# EAGLE board usbSimStepper-v10-routed (EAGLE 5.04)
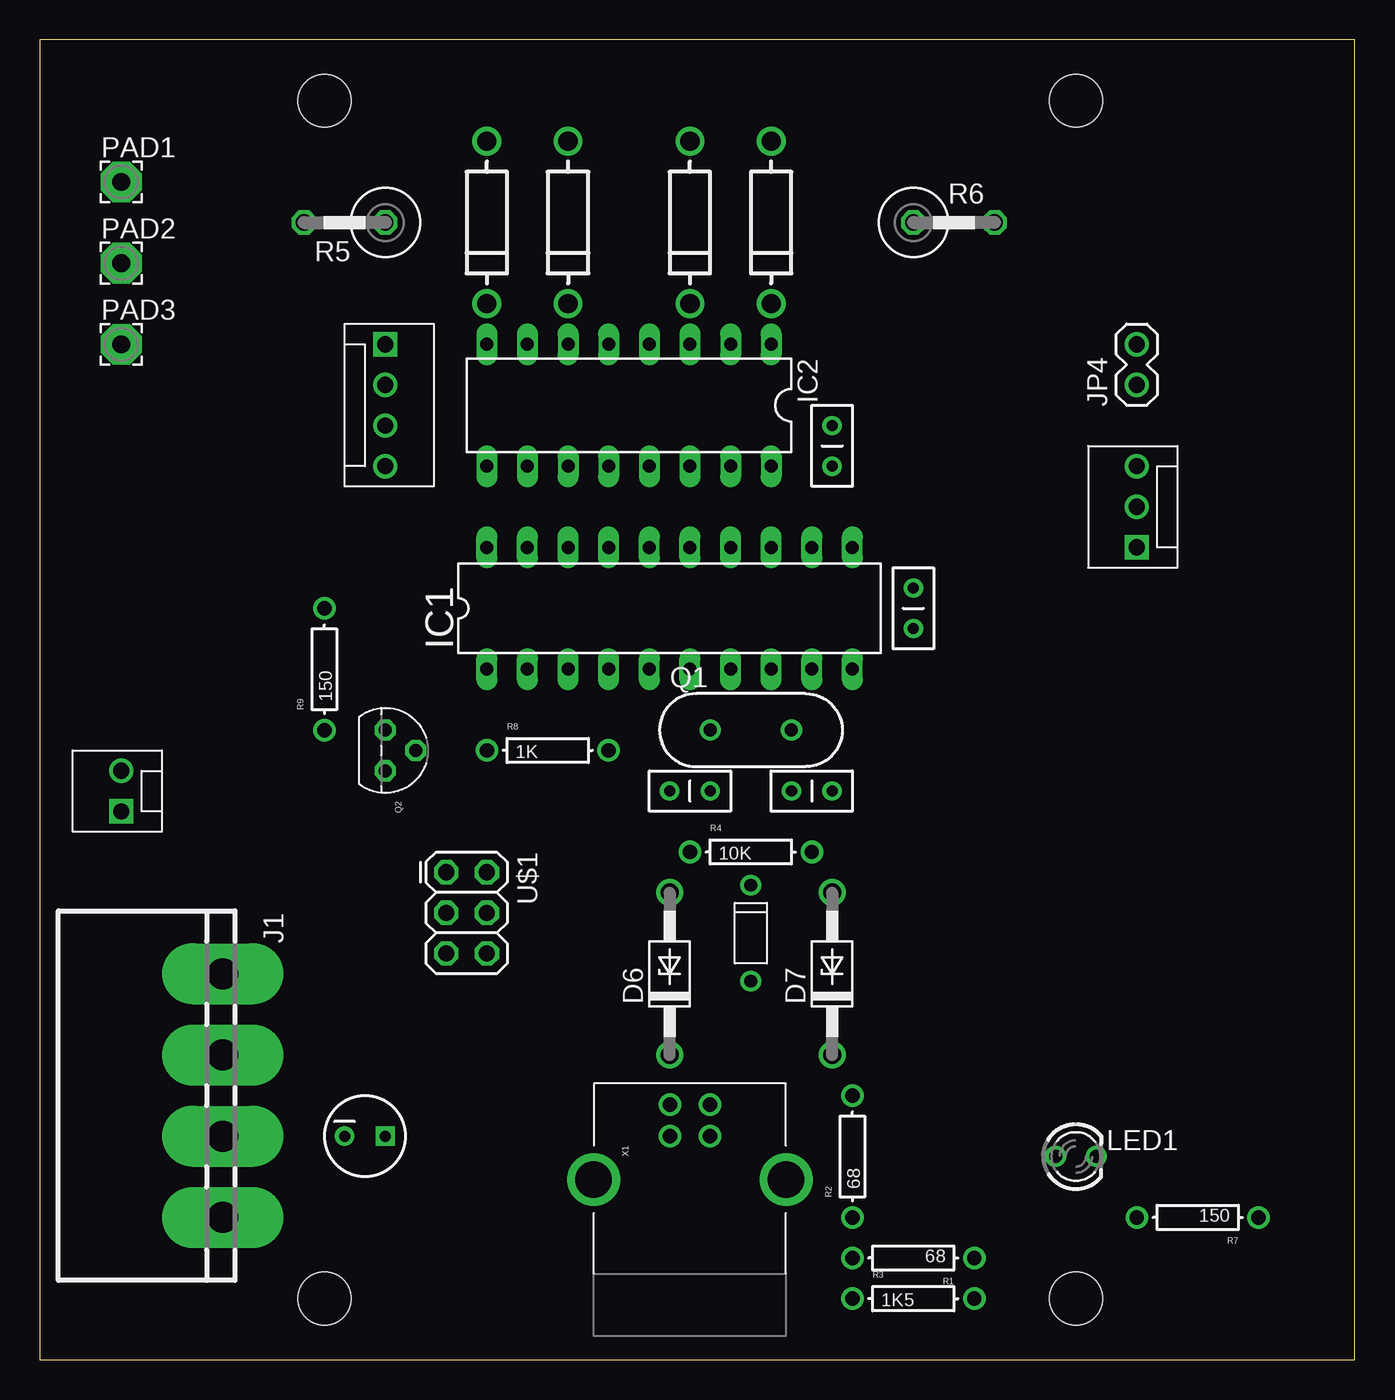
[diagram p0: board, top side]
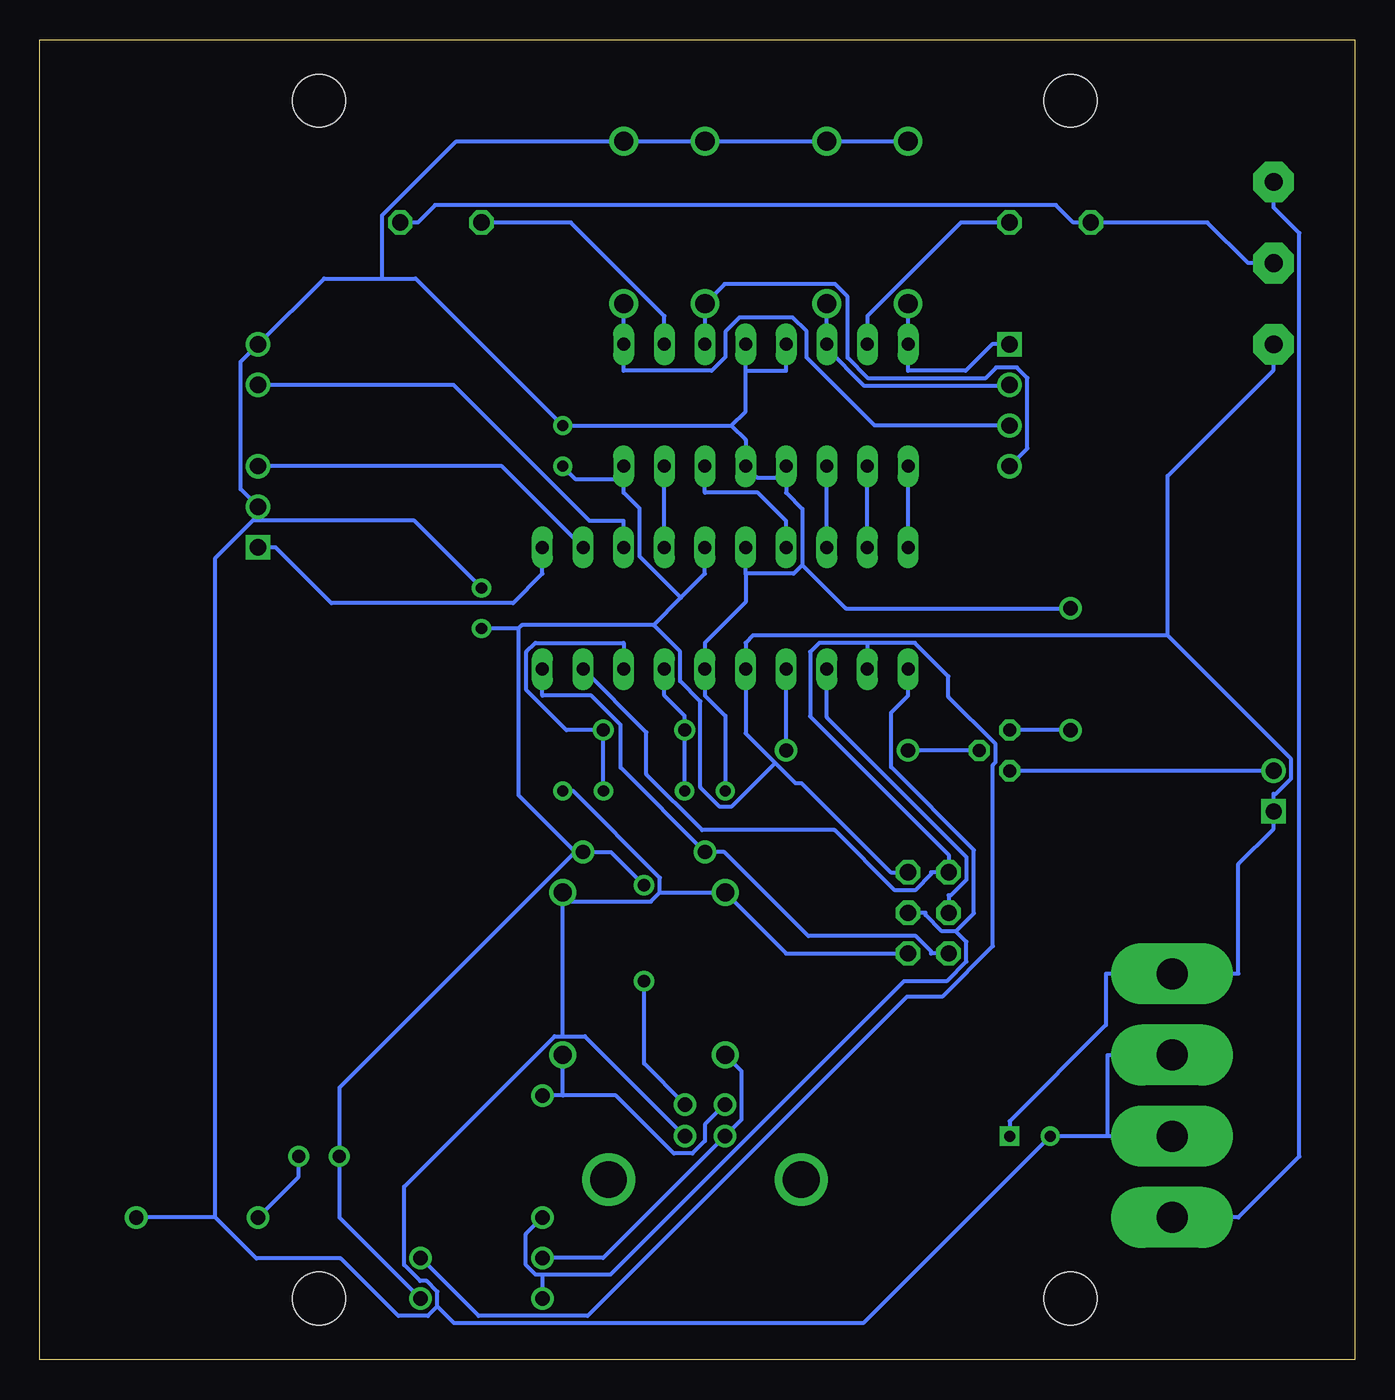
[diagram p1: board, bottom side, seen from below]

Size 82.22 x 82.54 mm. Coordinates in mm from the lower left corner, seen from the top.
Outline: 0,0 82.22,0 82.22,82.54 0,82.54 0,0
Copper layers (1*16): Top 0.035mm / dielectric 1.5mm / Bottom 0.035mm
Design rules "default": minimum track width 10mil, minimum drill 24mil, track to track 8mil, track to pad 8mil, pad to pad 8mil, via to via 8mil, smd to smd 8mil, copper to edge 40mil, drill to drill 8mil, minimum pad ring 10mil, minimum via ring 8mil, stop-mask expansion 4mil, vias tented up to drill 0mil, thermal gap 10mil

## Footprints (pad centres in the part's own frame; a part is rotated, then mirrored left to right if it is on the bottom)
CAP-PTH-SMALL2 = drill 0.7 round: 1 0,0; 2 2.54,0
CPOL-RADIAL-10UF-25V = drill 0.7 square: 1 1.27,0 | drill 0.7 round: 2 -1.27,0
DOIDE-1N4148 = drill 0.8 round: A 3,0; C -3,0
DIODE-0.4 = drill 1.2 round: A 0,0; C 10.16,0
DO41Z10 = drill 1.118 round: A 5.08,0; C -5.08,0
DIL20 = drill 0.813 long: 1 -11.43,-3.81; 2 -8.89,-3.81; 3 -6.35,-3.81; 4 -3.81,-3.81; 5 -1.27,-3.81; 6 1.27,-3.81; 7 3.81,-3.81; 8 6.35,-3.81; 9 8.89,-3.81; 10 11.43,-3.81; 11 11.43,3.81; 12 8.89,3.81; 13 6.35,3.81; 14 3.81,3.81; 15 1.27,3.81; 16 -1.27,3.81; 17 -3.81,3.81; 18 -6.35,3.81; 19 -8.89,3.81; 20 -11.43,3.81
DIL16 = drill 0.813 long: 1 -8.89,-3.81; 2 -6.35,-3.81; 3 -3.81,-3.81; 4 -1.27,-3.81; 5 1.27,-3.81; 6 3.81,-3.81; 7 6.35,-3.81; 8 8.89,-3.81; 9 8.89,3.81; 10 6.35,3.81; 11 3.81,3.81; 12 1.27,3.81; 13 -1.27,3.81; 14 -3.81,3.81; 15 -6.35,3.81; 16 -8.89,3.81
FLOP-4V = drill 1.93 pad 3.81 long: 1 7.62,0; 2 2.54,0; 3 -2.54,0; 4 -7.62,0
MOLEX-1X4 = drill 1.016 square: 1 0,0 | drill 1.016 round: 2 2.54,0; 3 5.08,0; 4 7.62,0
MOLEX-1X2 = drill 1.016 square: 1 0,0 | drill 1.016 round: 2 2.54,0
MOLEX-1X3 = drill 1.016 square: 1 0,0 | drill 1.016 round: 2 2.54,0; 3 5.08,0
1X02 = drill 1.016 round: 1 0,0; 2 2.54,0
LED3MM = drill 0.813 round: A -1.27,0; K 1.27,0
2,54/1,1 = drill 1.118 pad 2.54 octagon: 1 0,0
HC49US = drill 0.813 round: 1 -2.54,0; 2 2.54,0
TO-92 = drill 0.813 octagon: 1 -1.27,0; 2 0,1.905; 3 1.27,0
AXIAL-0.3 = drill 0.9 round: P$1 -3.81,0; P$2 3.81,0
0414V = drill 1.016 octagon: 1 -2.54,0; 2 2.54,0
2X3 = drill 1.016 octagon: 1 0,0; 2 0,2.54; 3 2.54,0; 4 2.54,2.54; 5 5.08,0; 6 5.08,2.54
STAND-OFF = hole 3.302: 0,0
USB-B-PTH = drill 0.914 round: D+ 0,1.25; D- 1.981,1.25; GND 0,-1.25; VBUS 1.981,-1.25 | drill 2.286 round: P$1 -2.718,-6.02; P$2 -2.718,6.02

## Placement (x,y rotation side)
C1  22pf  [CAP-PTH-SMALL2]  41.91,35.56 180 top
C2  22pf  [CAP-PTH-SMALL2]  46.99,35.56 0 top
C3  0.1uf  [CAP-PTH-SMALL2]  54.61,45.72 90 top
C4  10uf  [CPOL-RADIAL-10UF-25V]  20.32,13.97 0 top
C5  0.1uf  [CAP-PTH-SMALL2]  49.53,55.88 90 top
D1  [DOIDE-1N4148]  44.45,26.67 270 top
D2  [DIODE-0.4]  27.94,76.2 270 top
D3  [DIODE-0.4]  33.02,76.2 270 top
D4  [DIODE-0.4]  45.72,76.2 270 top
D5  [DIODE-0.4]  40.64,76.2 270 top
D6  1N4728  [DO41Z10]  39.37,24.13 90 top
D7  1N4728  [DO41Z10]  49.53,24.13 90 top
IC1  TINY26P  [DIL20]  39.37,46.99 0 top
IC2  UNC5804B  [DIL16]  36.83,59.69 180 top
J1  [FLOP-4V]  11.43,16.51 270 top
JP1  MOTOR  [MOLEX-1X4]  21.59,63.5 270 top
JP2  LED  [MOLEX-1X2]  5.08,34.29 90 top
JP3  ENC  [MOLEX-1X3]  68.58,50.8 90 top
JP4  ENCSW  [1X02]  68.58,60.96 90 top
LED1  [LED3MM]  64.77,12.7 0 top
PAD1  [2,54/1,1]  5.08,73.66 0 top
PAD2  [2,54/1,1]  5.08,68.58 0 top
PAD3  [2,54/1,1]  5.08,63.5 0 top
Q1  12MHz  [HC49US]  44.45,39.37 0 top
Q2  2N2222  [TO-92]  21.59,38.1 270 top
R1  68  [AXIAL-0.3]  54.61,6.35 180 top
R2  68  [AXIAL-0.3]  50.8,12.7 90 top
R3  1K5  [AXIAL-0.3]  54.61,3.81 0 top
R4  10K  [AXIAL-0.3]  44.45,31.75 0 top
R5  [0414V]  19.05,71.12 180 top
R6  [0414V]  57.15,71.12 0 top
R7  150  [AXIAL-0.3]  72.39,8.89 180 top
R8  1K  [AXIAL-0.3]  31.75,38.1 0 top
R9  150  [AXIAL-0.3]  17.78,43.18 90 top
U$1  PROG  [2X3]  25.4,30.48 270 top
U$2  STAND-OFF  [STAND-OFF]  64.77,3.81 0 top
U$3  STAND-OFF  [STAND-OFF]  17.78,78.74 0 top
U$4  STAND-OFF  [STAND-OFF]  64.77,78.74 0 top
U$5  STAND-OFF  [STAND-OFF]  17.78,3.81 0 top
X1  USBPTH  [USB-B-PTH]  40.64,13.97 90 top

## Library data of the parts
C1-C5 D1-D5 JP1-JP4 LED1 Q1 Q2 R1-R4 R7-R9 U$1-U$5 X1 = SparkFun
D6 D7 = diode
IC1 = atmel
IC2 = allegro
J1 = con-amp
PAD1-PAD3 = wirepad
R5 R6 = resistor

## Nets
GND: C1.2 C2.2 C3.2 C4.2 C5.2 D2.A D3.A D4.A D5.A D6.A D7.A IC1.6 IC1.16 IC2.4 IC2.5 IC2.12 IC2.13 J1.2 J1.3 JP3.2 JP4.2 R7.P$1 R9.P$2 U$1.6 X1.GND
M0: IC1.14 IC2.15
M1: IC1.17 IC2.14
M2: IC1.18 IC2.11
M3: IC1.19 IC2.10
M4: IC1.20 IC2.9
N$1: C1.1 IC1.7 Q1.1
N$2: C2.1 IC1.8 Q1.2
N$3: IC1.11 JP3.1
N$4: D6.C R1.P$2 X1.D+
N$5: D7.C R2.P$2 X1.D-
N$6: D1.A X1.VBUS
N$7: IC1.2 IC1.9 R1.P$1 U$1.1
N$8: J1.1 PAD1.1
N$9: IC2.2 R6.1
N$10: IC1.3 U$1.3
N$11: PAD2.1 R5.2 R6.2
N$12: IC2.7 R5.1
N$13: LED1.K R7.P$2
N$14: Q2.2 R8.P$1
N$15: D5.C IC2.3 JP1.4
N$16: D4.C IC2.1 JP1.3
N$17: D3.C IC2.6 JP1.2
N$18: D2.C IC2.8 JP1.1
N$19: JP2.2 Q2.3
N$20: Q2.1 R9.P$1
N$21: IC1.4 R8.P$2
N$22: IC1.13 JP4.1
N$23: IC1.12 JP3.3
N$24: IC1.1 R2.P$1 R3.P$1 U$1.4
RESET: IC1.10 R4.P$1 U$1.5
VCC: C3.1 C4.1 C5.1 D1.C IC1.5 IC1.15 IC2.16 J1.4 JP2.1 LED1.A PAD3.1 R3.P$2 R4.P$2 U$1.2

## Tracks (layer width: path | path; a pad name or v marks a point on that pad's centre or on a via)
GND
  Bottom 0.254: 43.46,29.21 43.46,30.14 48.88,35.56 C2.2 | 49.53,28.65 44.02,28.65 43.46,29.21 | 43.46,29.21 D6.A 35.56,25.4 U$1.6 | 49.53,20.23 49.53,28.65 | 49.53,28.65 D7.A | 49.53,20.23 50.04,20.23 59.45,10.82 59.45,5.92 58.45,4.91 58.04,4.91 57.37,4.25 57.37,3.32 | X1.GND 48.15,20.23 49.53,20.23 | 38.99,58.42 38.1,59.31 38.1,61.85 | 38.99,58.42 38.1,57.53 IC2.13 37.39,55.17 35.56,55.17 | 38.99,58.42 C5.2 58.73,67.62 60.82,67.62 | 38.1,49.15 38.1,47.37 40.64,44.83 IC1.6 40.64,42.91 40.64,41.53 39.37,40.26 C1.2 | 38.1,49.15 35.1,49.15 34.54,49.7 | 68.58,52.5 58.85,52.5 C3.2 | 71.25,8.89 71.25,50.15 68.89,52.5 68.58,52.5 | 68.58,52.5 JP3.2 69.67,54.44 69.67,62.41 JP4.2 64.46,67.62 60.82,67.62 | 57.37,3.32 57.97,2.73 59.82,2.73 63.42,6.33 68.69,6.33 71.25,8.89 | 71.25,8.89 R7.P$1 | 34.54,49.7 34.54,53.21 35.56,54.23 35.56,55.17 | R9.P$2 31.83,46.99 34.54,49.7 | 35.56,55.17 IC2.12 | 38.1,49.15 IC1.16 | 38.1,61.85 IC2.4 | IC2.5 35.56,61.85 38.1,61.85 | 60.82,67.62 60.82,71.57 56.19,76.2 D4.A D5.A D3.A D2.A | 57.37,3.32 56.32,2.27 30.75,2.27 C4.2 15.46,13.97 | 15.46,13.97 13.5,13.97 J1.2 | 15.46,13.97 15.46,19.05 J1.3
M0
  Bottom 0.254: IC1.14 IC2.15
M1
  Bottom 0.254: IC1.17 35.56,52.45 37.34,54.23 40.64,54.23 IC2.14
M2
  Bottom 0.254: IC1.18 IC2.11
M3
  Bottom 0.254: IC1.19 IC2.10
M4
  Bottom 0.254: IC1.20 IC2.9
N$1
  Bottom 0.254: C1.1 Q1.1 41.91,40.26 43.18,41.53 IC1.7
N$2
  Bottom 0.254: IC1.8 45.72,44.83 51.25,44.83 51.8,44.28 51.8,41.87 49.3,39.37 Q1.2 C2.1
N$3
  Bottom 0.254: IC1.11 50.8,49.15 52.64,47.31 64,47.31 67.49,50.8 JP3.1
N$4
  Bottom 0.254: R1.P$2 47.01,6.35 X1.D+ 38.35,15.01 38.35,18.03 D6.C
N$5
  Bottom 0.254: 49.53,16.51 R2.P$2 | X1.D- 40.64,14.7 40.64,13.67 41.43,12.89 42.58,12.89 46.21,16.51 49.53,16.51 | 49.53,16.51 D7.C
N$6
  Bottom 0.254: X1.VBUS 44.45,18.51 D1.A
N$7
  Bottom 0.254: 30.48,44.83 33.49,44.83 34.06,44.26 34.06,40.23 25.4,31.57 U$1.1 26.49,30.48 26.49,30.37 27.5,29.36 28.77,29.36 32.53,33.11 40.82,33.11 44.31,36.6 44.31,39.23 IC1.9 | R1.P$1 54.8,2.73 47.98,2.73 28.01,22.7 25.81,22.7 22.64,25.86 22.64,37.18 22.46,37.36 22.46,38.49 25.42,41.45 25.42,42.74 27.51,44.83 30.48,44.83 | 30.48,44.83 IC1.2
N$8
  Bottom 0.254: J1.1 7.29,8.89 3.48,12.7 3.48,70.46 5.08,72.06 PAD1.1
N$9
  Bottom 0.254: R6.1 49.03,71.12 43.18,65.27 IC2.2
N$10
  Bottom 0.254: U$1.3 25.4,29.03 25.26,29.03 24.28,30.02 24.28,31.42 33.02,40.16 IC1.3
N$11
  Bottom 0.254: R6.2 58.6,71.12 57.51,72.21 18.7,72.21 17.6,71.12 R5.2 9.22,71.12 6.68,68.58 PAD2.1
N$12
  Bottom 0.254: R5.1 24.63,71.12 30.48,65.27 IC2.7
N$13
  Bottom 0.254: R7.P$2 66.04,11.43 LED1.K
N$14
  Bottom 0.254: Q2.2 R8.P$1
N$15
  Bottom 0.254: JP1.4 20.48,56.99 20.48,61.4 21.13,62.06 22.44,62.06 23.12,61.37 30.41,61.37 31.71,62.67 31.71,66.48 32.51,67.27 39.41,67.27 D5.C IC2.3
N$16
  Bottom 0.254: JP1.3 30.03,58.42 34.29,62.68 34.29,64.31 35.15,65.18 38.49,65.18 39.37,64.29 39.37,62.71 40.23,61.85 45.72,61.85 IC2.1 D4.C
N$17
  Bottom 0.254: JP1.2 21.65,60.9 30.66,60.9 33.02,63.26 IC2.6 D3.C
N$18
  Bottom 0.254: JP1.1 22.68,63.5 24.33,61.85 27.94,61.85 IC2.8 D2.C
N$19
  Bottom 0.254: JP2.2 Q2.3
N$20
  Bottom 0.254: R9.P$1 Q2.1
N$21
  Bottom 0.254: R8.P$2 IC1.4
N$22
  Bottom 0.254: IC1.13 45.72,52.45 47.85,52.45 56.36,60.96 JP4.1
N$23
  Bottom 0.254: IC1.12 53.34,55.88 JP3.3
N$24
  Bottom 0.254: 50.8,5.32 51.23,5.32 51.83,5.92 51.83,7.86 R2.P$1 | 24.95,26.79 24.29,26.13 24.29,24.9 25.52,23.67 28.2,23.67 46.55,5.32 50.8,5.32 | 50.8,5.32 R3.P$1 | 24.95,26.79 23.82,27.91 23.82,31.88 29,37.06 29,40.46 27.94,41.53 IC1.1 | 24.95,26.79 25.83,26.79 26.85,27.8 26.85,27.94 U$1.4
RESET
  Bottom 0.254: U$1.5 26.49,25.4 26.49,25.54 27.45,26.49 34.17,26.49 39.42,31.75 R4.P$1 45.91,37.02 45.91,39.69 47.74,41.53 50.8,41.53 IC1.10
VCC
  Bottom 0.254: 52.3,45.72 52.3,35.31 48.75,31.75 | 43.85,45.94 52.09,45.94 52.3,45.72 | 52.3,45.72 C3.1 | 48.75,31.75 R4.P$2 46.53,31.75 D1.C | 48.75,31.75 63.5,17 LED1.A 63.5,8.89 R3.P$2 | 36.25,37.32 39,34.57 39.7,34.57 40.92,35.79 40.92,41.16 42.19,42.43 42.19,44.28 43.85,45.94 | 43.85,45.94 42.14,47.65 | 45.72,55.05 48.7,55.05 C5.1 | 45.72,55.05 45.72,54.23 44.73,53.24 44.73,50.24 42.14,47.65 | 45.72,55.05 IC2.16 | 42.14,47.65 40.64,49.15 IC1.15 | PAD3.1 5.08,61.9 11.72,55.26 11.72,45.29 | 11.72,45.29 3.99,37.56 3.99,36.34 4.94,35.38 5.08,35.38 JP2.1 5.08,33.2 7.29,30.99 7.29,24.13 11.26,24.13 J1.4 15.57,24.13 15.57,20.92 21.59,14.9 C4.1 | 11.72,45.29 37.64,45.29 38.1,44.83 IC1.5 38.1,39.17 36.25,37.32 | 36.25,37.32 34.99,36.06 34.61,36.06 29.03,30.48 U$1.2